# EAGLE board panel-gps (EAGLE 7.5.0)
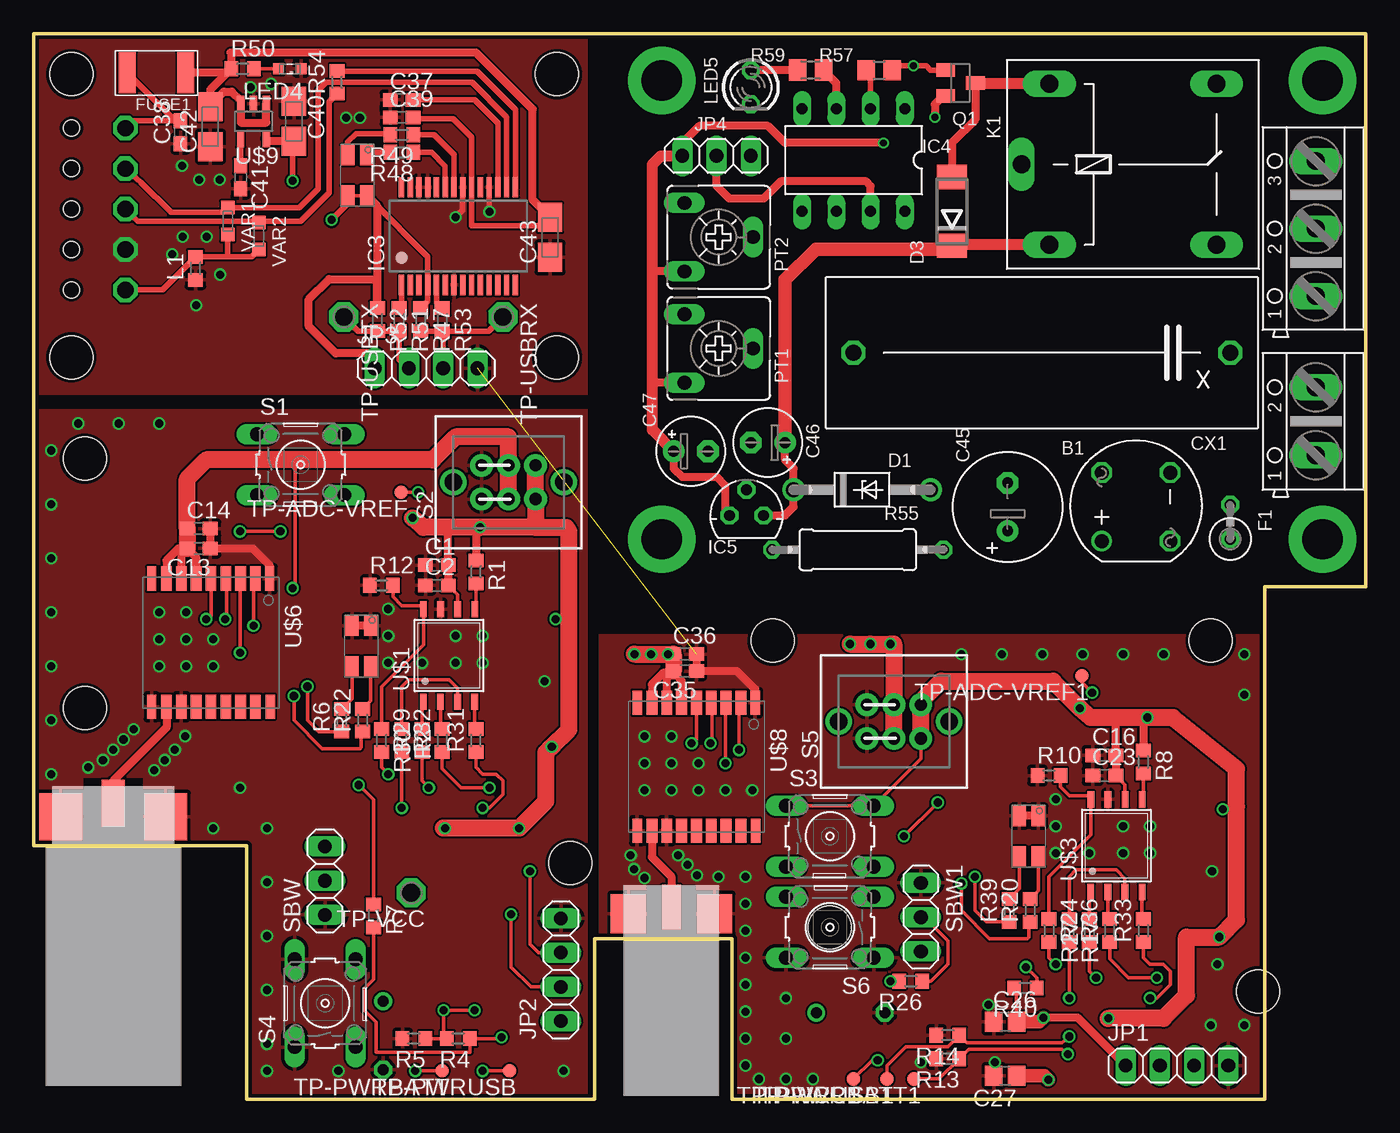
[diagram p0: board, top side]
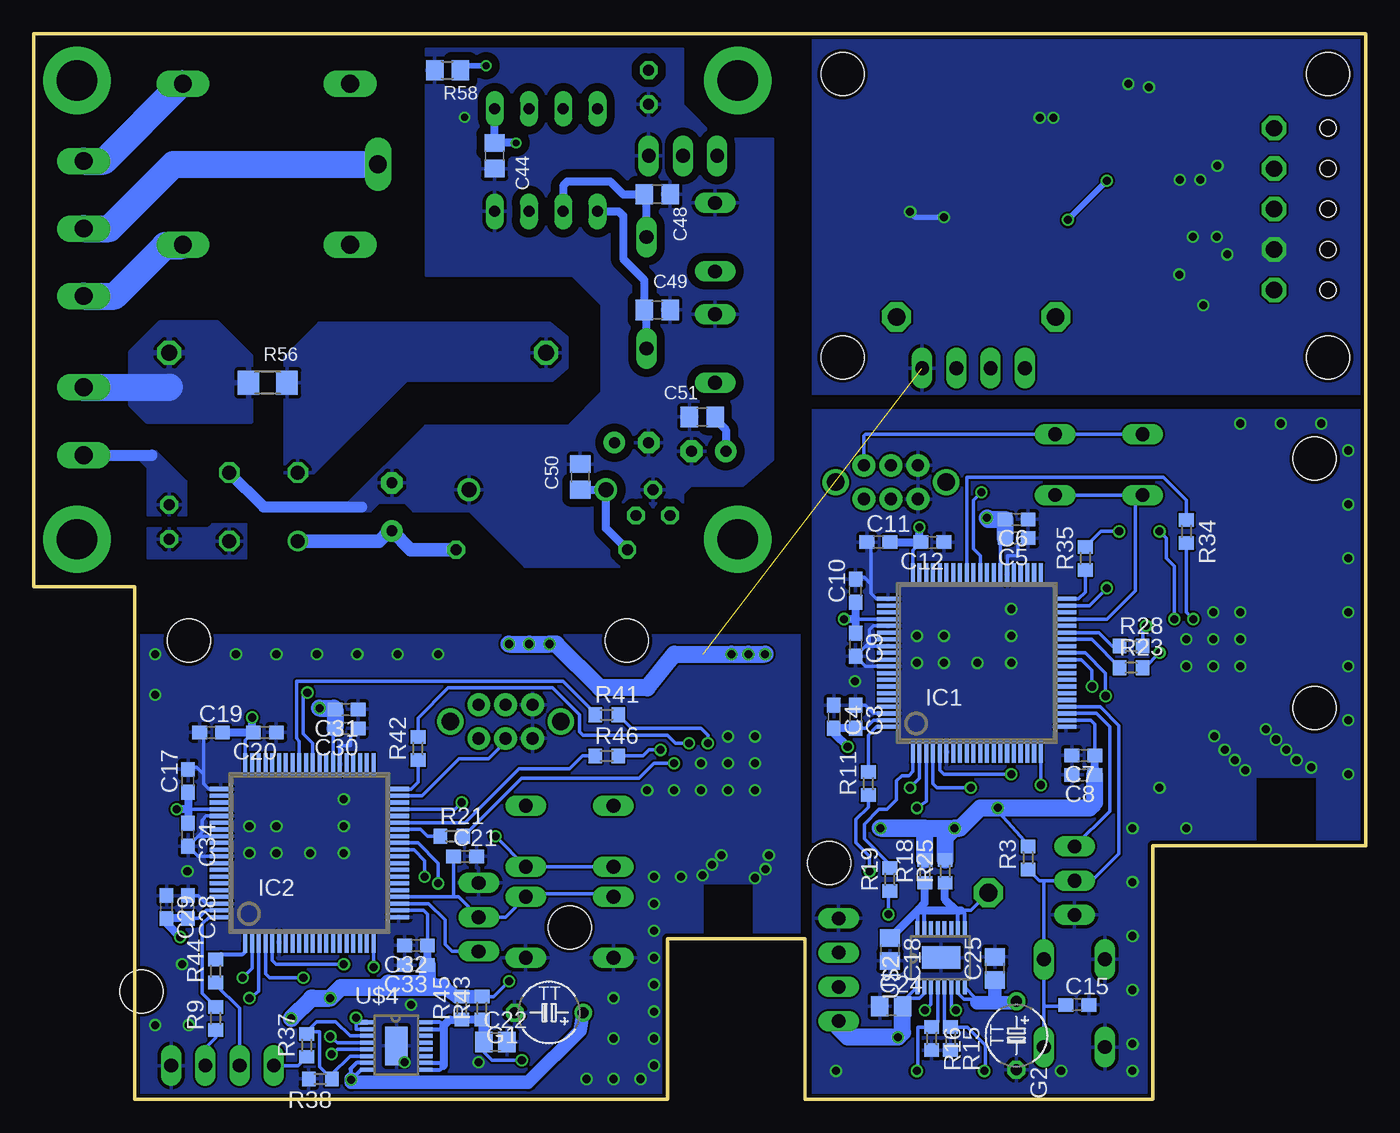
[diagram p1: board, bottom side, seen from below]

Size 98.8 x 79 mm. Coordinates in mm from the lower left corner, seen from the top.
Outline: 42.35,11.9 51.8,11.9 51.8,0 91.3,0 91.3,38 98.8,38 98.8,79 0,79 0,18.8 15.8,18.8 15.8,0 41.6,0 41.6,11.9 42.3,11.9
Copper layers (1*16): Top 0.035mm / dielectric 1.5mm / Bottom 0.035mm
Design rules "SeeedStudio_2layer_DRU_no_angle_20140221": minimum track width 6mil, minimum drill 12mil, track to track 6mil, track to pad 6mil, pad to pad 6mil, via to via 6mil, smd to smd 0mil, copper to edge 10mil, drill to drill 10mil, minimum pad ring 10mil, minimum via ring 6mil, stop-mask expansion 2mil, vias tented up to drill 100mil, thermal gap 10mil
Net classes: 0 signal: width 0.254 mm, drill 0.254 mm, clearance 0.152 mm; 1 charimp50: width 0.61 mm, drill 0.254 mm, clearance 0.559 mm
Holes 3.2 mm at 54.8,34 59.05,12.75 90.8,8 87.3,34 3.8,29 3.8,47.5 39.8,17.5 2.8,55 38.8,55 38.8,76 2.8,76
Holes 1.2 mm at 2.8,72 2.8,69 2.8,66 2.8,63 2.8,60
tRestrict: area 41.1,0.1 to 41.9,79; area 41.3,34.5 to 91.3,35.5; area -0.1,51.2 to 41.8,52.2
bRestrict: area 41.1,0.1 to 41.9,79; area -0.1,51.2 to 41.8,52.2; area 41.3,34.5 to 91.3,35.5

## Footprints (pad centres in the part's own frame; a part is rotated, then mirrored left to right if it is on the bottom)
RB1A = drill 1.016: + -2.54,2.54 | drill 1.016 octagon: - 2.54,-2.54; AC1 2.54,2.54; AC2 -2.54,-2.54
C0603 = smd 1.1 x 1: 1 -0.85,0; 2 0.85,0
C0805 = smd 1.3 x 1.5: 1 -0.85,0; 2 0.85,0
A/3216-18W = smd 2.15 x 1.8: + 1.475,0; - -1.475,0
C0805' = smd 1.3 x 1.5: 1 -0.95,0; 2 0.95,0
E3,5-8 = drill 0.813 pad 1.6: + -1.778,0 | drill 0.813 pad 1.6 octagon: - 1.778,0
E2,5-5 = drill 0.813 pad 1.6: + -1.27,0 | drill 0.813 pad 1.6 octagon: - 1.27,0
XC27B11 = drill 1.194 octagon: 1 -13.97,0; 2 13.97,0
DO41Z10 = drill 1.118: A 5.08,0; C -5.08,0
DO214AA = smd 1.8 x 2.2: A 2.55,0; C -2.55,0
0309V = drill 0.813 octagon: 1 -1.27,0; 2 1.27,0
F1812 = smd 1.27 x 3.048: 1 -2.159,0; 2 2.159,0
TAP5-45 = drill 0.813: + -2.54,0 | drill 0.813 octagon: - 2.54,0
PN_S-PQFP-G80 = smd 0.3 x 1.6: 1 -4.75,-6.6; 2 -4.25,-6.6; 3 -3.75,-6.6; 4 -3.25,-6.6; 5 -2.75,-6.6; 6 -2.25,-6.6; 7 -1.75,-6.6; 8 -1.25,-6.6; 9 -0.75,-6.6; 10 -0.25,-6.6; 11 0.25,-6.6; 12 0.75,-6.6; 13 1.25,-6.6; 14 1.75,-6.6; 15 2.25,-6.6; 16 2.75,-6.6; 17 3.25,-6.6; 18 3.75,-6.6; 19 4.25,-6.6; 20 4.75,-6.6; 41 4.75,6.6; 42 4.25,6.6; 43 3.75,6.6; 44 3.25,6.6; 45 2.75,6.6; 46 2.25,6.6; 47 1.75,6.6; 48 1.25,6.6; 49 0.75,6.6; 50 0.25,6.6; 51 -0.25,6.6; 52 -0.75,6.6; 53 -1.25,6.6; 54 -1.75,6.6; 55 -2.25,6.6; 56 -2.75,6.6; 57 -3.25,6.6; 58 -3.75,6.6; 59 -4.25,6.6; 60 -4.75,6.6 | smd 1.6 x 0.3: 21 6.6,-4.75; 22 6.6,-4.25; 23 6.6,-3.75; 24 6.6,-3.25; 25 6.6,-2.75; 26 6.6,-2.25; 27 6.6,-1.75; 28 6.6,-1.25; 29 6.6,-0.75; 30 6.6,-0.25; 31 6.6,0.25; 32 6.6,0.75; 33 6.6,1.25; 34 6.6,1.75; 35 6.6,2.25; 36 6.6,2.75; 37 6.6,3.25; 38 6.6,3.75; 39 6.6,4.25; 40 6.6,4.75; 61 -6.6,4.75; 62 -6.6,4.25; 63 -6.6,3.75; 64 -6.6,3.25; 65 -6.6,2.75; 66 -6.6,2.25; 67 -6.6,1.75; 68 -6.6,1.25; 69 -6.6,0.75; 70 -6.6,0.25; 71 -6.6,-0.25; 72 -6.6,-0.75; 73 -6.6,-1.25; 74 -6.6,-1.75; 75 -6.6,-2.25; 76 -6.6,-2.75; 77 -6.6,-3.25; 78 -6.6,-3.75; 79 -6.6,-4.25; 80 -6.6,-4.75
SSOP28 = smd 0.4 x 1.5: 1 -4.225,-3.625; 2 -3.575,-3.625; 3 -2.925,-3.625; 4 -2.275,-3.625; 5 -1.625,-3.625; 6 -0.975,-3.625; 7 -0.325,-3.625; 8 0.325,-3.625; 9 0.975,-3.625; 10 1.625,-3.625; 11 2.275,-3.625; 12 2.925,-3.625; 13 3.575,-3.625; 14 4.225,-3.625; 15 4.225,3.625; 16 3.575,3.625; 17 2.925,3.625; 18 2.275,3.625; 19 1.625,3.625; 20 0.975,3.625; 21 0.325,3.625; 22 -0.325,3.625; 23 -0.975,3.625; 24 -1.625,3.625; 25 -2.275,3.625; 26 -2.925,3.625; 27 -3.575,3.625; 28 -4.225,3.625
DIL8 = drill 0.813 long: 1 -3.81,-3.81; 2 -1.27,-3.81; 3 1.27,-3.81; 4 3.81,-3.81; 5 3.81,3.81; 6 1.27,3.81; 7 -1.27,3.81; 8 -3.81,3.81
78LXX = drill 0.813 octagon: GND 0,1.905; IN 1.27,0; OUT -1.27,0
1X04 = drill 1.016 long: 1 -3.81,0; 2 -1.27,0; 3 1.27,0; 4 3.81,0
1X03 = drill 1.016 long: 1 -2.54,0; 2 0,0; 3 2.54,0
RAS-12XX = drill 1.321 long: 1 -7.693,-5.969; 2 -7.693,5.969; O 4.699,5.969; P -9.76,0; S 4.699,-5.969
R0603 = smd 1 x 1.1: 1 -0.85,0; 2 0.85,0
BILED = smd 1.5 x 1: 1 -1.5,0.7; 2 1.5,0.7; 3 -1.5,-0.7; 4 1.5,-0.7
LED_KINGBRIGHT0603 = smd 0.8 x 0.8: A 0.825,0; C -0.825,0
LED3MM = drill 0.813 octagon: A -1.27,0; K 1.27,0
CA6V = drill 1.016 long: A -2.54,-2.54; E 2.54,-2.54; S 0,2.54
SOT23 = smd 1 x 1.4: 1 -0.95,-1.1; 2 0.95,-1.1; 3 0,1.1
0309/12 = drill 0.813 octagon: 1 -6.35,0; 2 6.35,0
R1206 = smd 1.6 x 1.803: 1 -1.422,0; 2 1.422,0
R0805 = smd 1.3 x 1.5: 1 -0.95,0; 2 0.95,0
M0805 = smd 1.3 x 1.6: 1 -0.95,0; 2 0.95,0
B3F-10XX = drill 1.016 long: 1 -3.251,2.261; 2 3.251,2.261; 3 -3.251,-2.261; 4 3.251,-2.261
2P2T = drill 0.9 pad 1.676: 1.1 -2,1.25; 1.2 -2,-1.25; 2.1 0,1.25; 2.2 0,-1.25; 3.1 2,1.25; 3.2 2,-1.25 | drill 1.3 pad 1.93: 3.3 4.1,0; 3.4 -4.1,0
TP10R = smd 1 x 1: TP 0,0
P1-13 = drill 1.321 pad 2.159 octagon: TP 0,0
JSOP-08 = smd 0.5 x 1.2: 1 -1.905,-3.429; 2 -0.635,-3.429; 3 0.635,-3.429; 4 1.905,-3.429; 5 1.913,3.429; 6 0.643,3.429; 7 -0.627,3.429; 8 -1.897,3.429
MSOP16 = smd 1 x 0.3: 1 -2.2,1.75; 2 -2.2,1.25; 3 -2.2,0.75; 4 -2.2,0.25; 5 -2.2,-0.25; 6 -2.2,-0.75; 7 -2.2,-1.25; 8 -2.2,-1.75; 9 2.2,-1.75; 10 2.2,-1.25; 11 2.2,-0.75; 12 2.2,-0.25; 13 2.2,0.25; 14 2.2,0.75; 15 2.2,1.25; 16 2.2,1.75 | smd 1.65 x 2.85: EXP 0,0
MWSL1251 = smd 3.2 x 3.5: P$1 -3.9,-2.25; P$3 3.9,-2.25 | smd 1.7 x 3.5: P$2 0,-3.25
MAX-8 = smd 1.8 x 0.7: 1 9.6,0.7; 9 9.6,9.45; 10 0.1,9.45; 18 0.1,0.65 | smd 1.8 x 0.8: 2 9.6,1.75; 3 9.6,2.85; 4 9.6,3.95; 5 9.6,5.05; 6 9.6,6.15; 7 9.6,7.25; 8 9.6,8.35; 11 0.1,8.35; 12 0.1,7.25; 13 0.1,6.15; 14 0.1,5.05; 15 0.1,3.95; 16 0.1,2.85; 17 0.1,1.75
MWSL1350 = smd 2.6 x 2.9: P$1 -3.2,-1.45; P$3 3.2,-1.45 | smd 1.4 x 3.3: P$2 0,-1.95
SOT23-5 = smd 0.55 x 1.2: 1 -0.95,-1.3; 2 0,-1.3; 3 0.95,-1.3; 4 0.95,1.3; 5 -0.95,1.3
CT/CN0603 = smd 1 x 1: 1 -1,0; 2 1,0
AK500/2 = drill 1.321 long: 1 -2.515,0; 2 2.515,0
AK500/3 = drill 1.321 long: 1 -5.004,0; 2 0,0; 3 5.004,0

## Placement (x,y rotation side)
B1  [RB1A]  81.76,43.91 90 top
C1  1u  [C0603]  29.9,39.6 0 top
C2  100n  [C0603]  29.9,38.1 0 top
C3  100n  [C0603]  37.85,28.35 270 bottom
C4  1u  [C0603]  39.45,28.35 270 bottom
C5  100n  [C0603]  25.9,41.6 180 bottom
C6  1u  [C0603]  25.9,43 180 bottom
C7  100n  [C0603]  20.95,25.5 180 bottom
C8  1u  [C0603]  20.95,24.05 180 bottom
C9  100n  [C0603]  37.85,33.7 270 bottom
C10  1u  [C0603]  37.85,37.7 90 bottom
C11  100n  [C0603]  36.15,41.3 0 bottom
C12  1u  [C0603]  32.15,41.3 180 bottom
C13  100n  [C0603]  12.25,40.85 180 top
C14  1u  [C0603]  12.25,42.3 0 top
C15  1 n  [C0603]  21.4,7 0 bottom
C16  1u  [C0603]  79.4,25.5 0 top
C17  1u  [C0603]  87.35,23.6 90 bottom
C18  4.7uF at least  [C0805]  35.3,11.1 270 bottom
C19  100n  [C0603]  85.65,27.2 0 bottom
C20  1u  [C0603]  81.65,27.2 180 bottom
C21  1 n  [C0603]  66.8,18 0 bottom
C22  4.7uF at least  [C0805]  64.55,4.25 0 bottom
C23  100n  [C0603]  79.4,24 0 top
C24  4.7uF  [C0805]  35.2,6.9 0 bottom
C25  4.7uF at least  [C0805]  27.5,9.7 90 bottom
C26  4.7uF  [C0805]  72.05,5.75 0 top
C27  4.7uF at least  [C0805]  72.05,1.75 180 top
C28  100n  [C0603]  87.35,14.25 270 bottom
C29  1u  [C0603]  88.95,14.25 270 bottom
C30  100n  [C0603]  75.6,27.5 180 bottom
C31  1u  [C0603]  75.6,28.9 180 bottom
C32  100n  [C0603]  70.45,11.4 180 bottom
C33  1u  [C0603]  70.45,9.95 180 bottom
C34  100n  [C0603]  87.35,19.6 270 bottom
C35  100n  [C0603]  48.3,31.75 180 top
C36  1u  [C0603]  48.3,33 0 top
C37  100nF  [C0603]  27.3,74.1 0 top
C38  10nF  [C0603]  10.9,71.7 90 top
C39  100nF  [C0603]  27.3,72.8 0 top
C40  1uF  [A/3216-18W]  19.3,72.5 270 top
C41  470pF  [C0603]  15.35,68.35 270 top
C42  1uF  [A/3216-18W]  13.1,72.1 90 top
C43  4.7uF  [A/3216-18W]  38.3,63.9 90 top
C44  100nF  [C0805']  64.61,69.95 270 bottom
C45  100uF  [E3,5-8]  72.23,43.91 90 top
C46  [E2,5-5]  54.45,48.68 180 top
C47  [E2,5-5]  48.74,48.04 0 top
C48  [C0805']  52.55,67.09 0 bottom
C49  [C0805']  52.55,58.52 0 bottom
C50  100nF  [C0805']  58.27,46.14 90 bottom
C51  100nF  [C0805']  49.22,50.58 180 bottom
CX1  [XC27B11]  74.77,55.34 180 top
D1  BZX85  [DO41Z10]  61.44,45.19 0 top
D3  [DO214AA]  68.11,65.82 90 top
F1  3R3  [0309V]  88.74,42.8 90 top
FUSE1  SMD1206R500SF  [F1812]  9.1,76.1 180 top
G1  BATTERYTAP5-45  [TAP5-45]  60.58,6.42 180 bottom
G2  BATTERYTAP5-45  [TAP5-45]  25.92,4.72 270 bottom
IC1  MSP430FR698X(1)80-PIN_PN  [PN_S-PQFP-G80]  28.85,32.35 0 bottom
IC2  MSP430FR698X(1)80-PIN_PN  [PN_S-PQFP-G80]  78.35,18.25 0 bottom
IC3  FT232RL  [SSOP28]  31.5,64 0 top
IC4  PIC12F675P  [DIL8]  60.8,69.63 180 top
IC5  [78LXX]  52.87,43.28 0 top
JP1  [1X04]  84.8,2.5 0 top
JP2  [1X04]  39.1,9.6 90 top
JP3  [1X04]  29.1,54.2 0 top
JP4  [1X03]  50.64,69.95 180 top
K1  RAS-1215  [RAS-12XX]  83.03,69.31 0 top
L1  [R0603]  12,61.6 90 top
LED1  [BILED]  24.3,33.6 270 top
LED2  [BILED]  73.8,19.5 270 top
LED3  [BILED]  24,68.5 270 top
LED4  [LED_KINGBRIGHT0603]  19,76.4 180 top
LED5  [LED3MM]  53.18,75.03 270 top
PT1  [CA6V]  50.8,55.66 270 top
PT2  [CA6V]  50.8,63.92 270 top
Q1  BC846  [SOT23]  68.74,75.35 270 top
R1  470k  [R0603]  32.8,39.1 270 top
R2  470k  [R0603]  27.3,26.6 270 top
R3  47k  [R0603]  25.05,17.9 90 bottom
R4  100k  [R0603]  31.5,4.5 180 top
R5  39.2k  [R0603]  28.2,4.5 180 top
R6  160  [R0603]  22.85,28.1 90 top
R7  100  [R0603]  25.2,13.6 270 top
R8  470k  [R0603]  82.3,25 270 top
R9  100  [R0603]  85.3,6 90 bottom
R10  470k  [R0603]  75.3,24 0 top
R11  100  [R0603]  36.9,23.4 90 bottom
R12  470k  [R0603]  25.8,38.1 0 top
R13  1k  [R0603]  67.8,3 180 top
R14  1k  [R0603]  67.8,4.75 180 top
R15  1k  [R0603]  30.8,4.5 270 bottom
R16  1k  [R0603]  32.2,4.5 270 bottom
R17  470k  [R0603]  76.8,12.5 270 top
R18  0  [R0603]  32.7,16.9 90 bottom
R19  100  [R0603]  35.3,16.3 90 bottom
R20  180  [R0603]  73.9,14 90 top
R21  100  [R0603]  67.8,19.5 0 bottom
R22  180  [R0603]  24.4,28.1 90 top
R23  100  [R0603]  17.4,32 0 bottom
R24  100  [R0603]  78.3,12.5 90 top
R25  0  [R0603]  31.2,16.9 90 bottom
R26  47k  [R0603]  65.05,8.75 180 top
R27  100  [R0603]  75.3,12.5 270 top
R28  100  [R0603]  17.4,33.6 0 bottom
R29  100  [R0603]  28.8,26.6 90 top
R30  100  [R0603]  25.8,26.6 270 top
R31  100  [R0603]  32.8,26.6 90 top
R32  100  [R0603]  30.3,26.6 90 top
R33  100  [R0603]  82.3,12.5 90 top
R34  0  [R0603]  13.3,42.1 270 bottom
R35  0  [R0603]  20.8,40.1 90 bottom
R36  100  [R0603]  79.8,12.5 90 top
R37  100k  [R0603]  78.55,4 90 bottom
R38  39.2k  [R0603]  77.55,1.5 180 bottom
R39  160  [R0603]  72.35,14 90 top
R40  100  [R0603]  73.55,8.25 180 top
R41  0  [R0603]  56.3,28.5 0 bottom
R42  0  [R0603]  70.3,26 90 bottom
R43  0  [R0603]  65.55,6.75 90 bottom
R44  100  [R0603]  85.3,9.5 90 bottom
R45  0  [R0603]  67.05,6.75 90 bottom
R46  100  [R0603]  56.3,25.45 0 bottom
R47  33k  [R0603]  28.7,57.8 270 top
R48  240  [R0603]  27.3,70.2 180 top
R49  220  [R0603]  27.3,71.5 180 top
R50  150  [R0603]  15.5,76.4 0 top
R51  100  [R0603]  27.1,57.8 270 top
R52  33k  [R0603]  25.5,57.8 270 top
R53  100  [R0603]  30.3,57.8 270 top
R54  0  [R0603]  22.5,75.4 90 top
R55  220R  [0309/12]  61.12,40.74 180 top
R56  1M  [R1206]  81.44,53.12 0 bottom
R57  2.7k  [R0805]  62.71,76.3 0 top
R58  68k  [R0805]  68.11,76.3 0 bottom
R59  150R  [M0805]  57.63,76.3 0 top
S1  [B3F-10XX]  19.8,47.05 0 top
S2  2P2T  [2P2T]  35.22,45.75 0 top
S3  [B3F-10XX]  59.05,19.5 0 top
S4  RESET  [B3F-10XX]  21.61,7.12 90 top
S5  2P2T  [2P2T]  63.8,28 0 top
S6  RESET  [B3F-10XX]  59.05,12.75 180 top
SBW  [1X03]  21.6,16.2 90 top
SBW1  [1X03]  65.8,13.5 270 top
TP-ADC-VREF  TPSQTP10R  [TP10R]  27.25,45 180 top
TP-ADC-VREF1  TPSQTP10R  [TP10R]  77.75,31.4 180 top
TP-PWRBATT  TPSQTP10R  [TP10R]  30.3,2.1 180 top
TP-PWRBATT1  TPSQTP10R  [TP10R]  65.3,1.5 180 top
TP-PWRUSB  TPSQTP10R  [TP10R]  35.3,2.1 180 top
TP-PWRUSB1  TPSQTP10R  [TP10R]  63.3,1.5 180 top
TP-USBRX  TPSQPAD1-13  [P1-13]  34.8,58 270 top
TP-USBTX  TPSQPAD1-13  [P1-13]  23,58 270 top
TP-VCC  TPSQPAD1-13  [P1-13]  28,15.3 180 top
TP-VCC1  TPSQTP10R  [TP10R]  60.8,1.5 180 top
U$1  AT45DB641E-SHNJSOP-08  [JSOP-08]  30.8,32.9 0 top
U$2  LTC4415  [MSOP16]  31.5,10.5 90 bottom
U$3  AT45DB641E-SHNJSOP-08  [JSOP-08]  80.3,18.8 0 top
U$4  LTC4415  [MSOP16]  71.9,3.95 0 bottom
U$5  MWSL1251  [MWSL1251]  5.9,18.7 180 top
U$6  MAX-8C-0  [MAX-8]  18.2,29 90 top
U$7  MWSL1251MWSL1350  [MWSL1350]  47.3,12.3 180 top
U$8  MAX-8C-0  [MAX-8]  54.2,19.8 90 top
U$9  TC1185  [SOT23-5]  16.3,72.5 180 top
VAR1  VARISTORCN0603  [CT/CN0603]  14.4,65.1 270 top
VAR2  VARISTORCN0603  [CT/CN0603]  16.7,64 270 top
X2  [AK500/2]  95.09,50.27 90 top
X3  [AK500/3]  95.09,64.55 90 top

## Library data of the parts
B1 = rectifier
C1-C39 C41 = tagps; SPICEPREFIX: C
C40 C42 C43 G1 G2 IC1 IC2 JP1-JP3 LED1-LED4 S2 S5 SBW SBW1 TP-ADC-VREF TP-ADC-VREF1 TP-PWRBATT TP-PWRBATT1 TP-PWRUSB TP-PWRUSB1 TP-USBRX TP-USBTX TP-VCC TP-VCC1 U$1-U$9 VAR1 VAR2 = tagps
C44-C51 CX1 F1 R55-R59 = rcl
D1 D3 = diode
FUSE1 = tagps; MPN: SMD1206R500SF
IC3 = tagps; MPN: FT232RL; OC_FARNELL: 1146032; OC_NEWARK: 91K9918
IC4 = microchip; MF: MICROCHIP; MPN: PIC12F675-E/P; OC_FARNELL: 9759018; OC_NEWARK: 92C4340
IC5 = v-reg
JP4 = pinhead
K1 = my_library
L1 R1-R54 = tagps; SPICEPREFIX: R
LED5 = led
PT1 PT2 = pot
Q1 = transistor
S1 S3 S4 S6 = tagps; MPN: B3F-1000; OC_FARNELL: 176432; OC_NEWARK: 36M3542
X2 X3 = con-ptr500; OC_FARNELL: unknown; OC_NEWARK: unknown

## Nets
+5V: C44.1 C47.+ C51.1 IC4.1 IC5.OUT JP4.3 PT1.E PT2.E
+12V: C46.+ C50.1 D1.C D3.C IC5.IN K1.1 R55.2
ADC-BATT: R15.1 TP-PWRBATT.TP U$2.5
ADC-BATT2: R13.1 TP-PWRBATT1.TP U$4.5
ADC-VREF: IC1.50 TP-ADC-VREF.TP
ADC-VREF2: IC2.50 TP-ADC-VREF1.TP
FT232-RX: JP3.3 R47.2 R53.2 TP-USBRX.TP
FT232-TX: JP3.2 R51.2 R52.2 TP-USBTX.TP
GND: C1.1 C2.1 C3.1 C4.1 C5.1 C6.1 C7.2 C8.2 C9.2 C10.2 C11.1 C12.1 C13.1 C14.2 C15.2 C18.2 C24.1 C25.2 G2.- IC1.6 IC1.21 IC1.46 IC1.61 IC1.65 IC1.68 IC1.71 IC1.78 JP2.4 LED1.1 LED1.3 R5.2 R12.1 R15.2 R16.2 S2.1.1 S2.1.2 S4.1 S4.2 SBW.1 U$1.7 U$2.EXP U$5.P$1 U$5.P$3 U$6.1 U$6.10 U$6.12
GND1: C16.1 C17.2 C19.1 C20.1 C21.2 C22.2 C23.1 C26.1 C27.2 C28.1 C29.1 C30.1 C31.1 C32.2 C33.2 C34.2 C35.1 C36.2 C37.1 C38.1 C39.1 C40.- C41.2 C42.- C43.- G1.- IC2.6 IC2.21 IC2.46 IC2.61 IC2.65 IC2.68 IC2.71 IC2.78 IC3.7 IC3.18 IC3.21 IC3.25 IC3.26 JP1.4 JP3.4 L1.1 LED2.1 LED2.3 LED4.C R10.1 R13.2 R14.2 R38.2 S5.1.1 S5.1.2 S6.1 S6.2 SBW1.1 U$3.7 U$4.EXP U$7.P$1 U$7.P$3 U$8.1 U$8.10 U$8.12 U$9.2
GND2: B1.- C44.2 C45.- C46.- C47.- C48.2 C49.2 C50.2 C51.2 D1.A IC4.8 IC5.GND JP4.1 LED5.K PT1.A PT2.A Q1.2 R58.1
LED: IC4.3 R59.2
LED1: IC1.32 R22.1
LED2: IC1.31 R6.1
LED5: IC2.31 R39.1
LED6: IC2.32 R20.1
MB-GPS-RX: R23.2 U$6.3
MB-GPS-RX2: R21.2 U$8.3
MB-GPS-TIMEPULSE: IC1.40 R35.1
MB-GPS-TIMEPULSE2: IC2.40 R42.1
MB-GPS-TX: R28.2 U$6.2
MB-GPS-TX2: R46.2 U$8.2
MB-GPS-WAKEUP: IC1.52 R34.1
MB-GPS-WAKEUP2: IC2.52 R41.1
MB-PWR_GPS_SENSE: C13.2 C14.1 IC1.39 S2.2.1 S2.2.2 U$6.6 U$6.7 U$6.8
MB-PWR_GPS_SENSE2: C35.2 C36.1 IC2.39 S5.2.1 S5.2.2 U$8.6 U$8.7 U$8.8
MCU-RX-FT2: IC2.1 R44.2
MCU-RX-FT232: IC1.1 R19.2
MCU-TX-FT2: JP1.3 R9.1
MCU-TX-FT232: JP2.3 R11.1
N$1: IC2.80 R9.2
N$2: IC1.80 R11.2
N$3: IC1.4 R29.1
N$5: R2.1 U$1.3
N$7: R4.2 R5.1 U$2.3 U$2.6
N$8: JP2.2 R19.1
N$11: R1.2 U$1.5
N$14: R12.2 R30.1 U$1.8
N$24: IC1.2 R32.1
N$25: R16.1 TP-PWRUSB.TP U$2.4
N$26: C18.1 R18.1 R25.1 TP-VCC.TP U$2.9 U$2.10 U$2.15 U$2.16
N$27 [charimp50]: U$5.P$2 U$6.11
N$30: R37.2 R38.1 U$4.3 U$4.6
N$31: R17.1 U$3.3
N$32: R8.2 U$3.5
N$33: LED1.4 R6.2
N$34: LED1.2 R22.2
N$35: IC1.3 R31.1
N$36: IC1.34 R23.1
N$37: R14.1 TP-PWRUSB1.TP U$4.4
N$38: C22.1 R43.1 R45.1 TP-VCC1.TP U$4.9 U$4.10 U$4.15 U$4.16
N$39: IC2.3 R33.1
N$40: IC2.4 R24.1
N$41: R10.2 R27.1 U$3.8
N$42: IC2.2 R36.1
N$43: LED2.4 R39.2
N$44: LED2.2 R20.2
N$45: IC1.35 R28.1
N$46: R34.2 U$6.5
N$47: R35.2 U$6.4
N$48: IC2.34 R21.1
N$49: R41.2 U$8.5
N$50: R42.2 U$8.4
N$51 [charimp50]: U$7.P$2 U$8.11
N$52: JP1.2 R44.1
N$53: IC2.35 R46.1
N$54: IC3.1 R51.1
N$55: C37.2 IC3.17
N$56: IC3.23 R48.1
N$57: IC3.22 R49.1
N$58: LED3.1 R48.2
N$59: R54.1 VAR2.1
N$60: IC3.16 VAR1.1
N$61: C41.1 U$9.4
N$62: C38.2 FUSE1.2
N$63: L1.2 VAR1.2 VAR2.2
N$64: LED3.3 R49.2
N$65: LED4.A R50.2
N$66: IC3.5 R53.1
N$67: IC3.15 R54.2
N$68: D3.A K1.2 Q1.3
N$69: B1.+ C45.+ R55.1
N$70: K1.P X3.2
N$71: K1.S X3.1
N$72: K1.O X3.3
N$73: B1.AC1 CX1.2 R56.2
N$74: B1.AC2 F1.1
N$75: CX1.1 R56.1 X2.2
N$76: Q1.1 R57.2 R58.2
N$77: LED5.A R59.1
N$81: F1.2 X2.1
PT1: C48.1 IC4.6 PT2.S
PT2: C49.1 IC4.5 PT1.S
PWR-USB-SENSE: IC1.20 R7.1
PWR-USB-SENSE2: IC2.20 R40.1
RL1: IC4.2 R57.1
SBW-TCK: IC1.23 SBW.3
SBW-TCK2: IC2.23 SBW1.3
SBW-TDO/TDI: C15.1 IC1.24 R3.1 S4.3 S4.4 SBW.2
SBW-TDO/TDI2: C21.1 IC2.24 R26.1 S6.3 S6.4 SBW1.2
SPICLK: R32.2 U$1.2
SPICLK2: R36.2 U$3.2
SPICSN: R31.2 U$1.4
SPICSN2: R33.2 U$3.4
SPISI: R29.2 U$1.1
SPISI2: R24.2 U$3.1
SPISO: IC1.5 R30.2
SPISO2: IC2.5 R27.2
SW-CFG-GPS: IC1.37 S1.3 S1.4
SW-CFG-GPS2: IC2.37 S3.3 S3.4
THERM: IC4.7 JP4.2
VBUS: C39.2 C42.+ C43.+ FUSE1.1 IC3.20 R50.1 U$9.1 U$9.3
VCC: C1.2 C2.2 C3.2 C4.2 C5.2 C6.2 C7.1 C8.1 C9.1 C10.1 C11.2 C12.2 IC1.22 IC1.47 IC1.60 IC1.64 IC1.79 R1.1 R2.2 R3.2 R18.2 R25.2 S1.1 S1.2 S2.3.1 S2.3.2 U$1.6
VCC1: C16.2 C17.1 C19.2 C20.2 C23.2 C28.2 C29.2 C30.2 C31.2 C32.1 C33.1 C34.1 IC2.22 IC2.47 IC2.60 IC2.64 IC2.79 R8.1 R17.2 R26.2 R43.2 R45.2 S3.1 S3.2 S5.3.1 S5.3.2 U$3.6
VCC_BATT_IN: C25.1 G2.+ U$2.7 U$2.8
VCC_BATT_IN2: C27.1 G1.+ U$4.7 U$4.8
VCCUSB: C40.+ IC3.4 JP3.1 LED3.2 LED3.4 R47.1 R52.1 U$9.5
VCCUSBGPS: C24.2 JP2.1 R4.1 R7.2 U$2.1 U$2.2
VCCUSBGPS2: C26.2 JP1.1 R37.1 R40.2 U$4.1 U$4.2

## Tracks (layer width: path | path; a pad name or v marks a point on that pad's centre or on a via)
+5V  (via drill 0.5)
  Top 0.6: PT1.E 45.88,53.12 | PT2.E 45.88,61.38 | v63.03,70.9 55.72,70.9 54.45,72.17 49.38,72.17 48.1,70.9 JP4.3 | C47.+ 47.47,46.77 48.1,46.14 50.64,46.14 51.28,45.5 51.28,43.6 IC5.OUT
  Top 0.8: C47.+ 45.88,49.63 45.88,53.12 45.88,61.38 45.88,69.31 46.52,69.95 JP4.3
  Bottom 0.6: C44.1 | C51.1 48.27,50.43 47.47,49.63 C47.+ | v63.03,70.9 C44.1 | C44.1 IC4.1
+12V
  Top 0.6: IC5.IN 55.72,43.28 56.36,43.91 D1.C 56.36,46.77 55.72,47.41 C46.+
  Top 0.8: K1.1 68.18,63.35 D3.C
  Top 1: D3.C 67.86,63.03 58.01,63.03 55.72,60.74 C46.+
  Bottom 0.6: C50.1 D1.C 56.36,42.33 R55.2
ADC-BATT  (via drill 0.6)
  Top 0.254: v28.3,2.1 TP-PWRBATT.TP
  Bottom 0.254: U$2.5 31.25,5.8 arc-90 R15.1 29.55,5.35 28.2,4 28.2,2.2 v28.3,2.1
ADC-BATT2  (via drill 0.6)
  Top 0.254: v76.7,3.35 76.25,3.7 69.35,3.7 R13.1 67.15,1.5 TP-PWRBATT1.TP
  Bottom 0.254: U$4.5 76.25,3.7 v76.7,3.35
ADC-VREF  (via drill 0.6)
  Top 0.254: TP-ADC-VREF.TP v28.5,45
  Bottom 0.254: 28.6,44.9 v28.5,45 29.1,44.4 29.1,40.8 28.6,40.3 IC1.50
ADC-VREF2  (via drill 0.6)
  Top 0.254: TP-ADC-VREF1.TP 77.75,30.9 v78.5,30.15
  Bottom 0.254: IC2.50 78.1,26.4 78.8,27.1 78.8,29.85 v78.5,30.15
FT232-RX
  Top 0.406: R47.2 R53.2 | R53.2 33.75,56.95 TP-USBRX.TP | R53.2 30.37,56.95 JP3.3
FT232-TX
  Top 0.406: TP-USBTX.TP 24.05,56.95 R52.2 R51.2 27.1,54.83 JP3.2
GND  (via drill 0.6)
  Top 0.61: LED1.1 LED1.3 | U$6.1 17.5,39.6 16.25,40.85 C13.1 C14.2
  Bottom 0.254: 22.1,27.6 IC1.21 | 25.1,41.25 C5.1 25.8,41.05 25.8,40.3 26.6,40.3 IC1.46 | IC1.61 36.3,37.1 36.7,37.5 36.7,38.2 | 36.7,38.2 37.2,38.7 37.7,38.7 C10.2 | IC1.78 36.5,28.6 37.1,29.2 C3.1 | 37,41.2 36.7,40.9 36.7,38.2 | IC1.71 37.1,32.1 C9.2 37.1,33.6 | IC1.68 37.1,33.6 | IC1.65 36.5,35.1 36.8,34.8 36.8,33.9 37.1,33.6
  other vias: 37.9,31 26.3,36.35 33.3,34.35 31.3,34.35 26.3,34.35 26.3,32.35 28.8,32.35 31.3,32.35 33.3,32.35 9.71,25.15 17.3,2.1 22.6,2.1 39.3,2.1 1.3,44.1 1.3,48.1 10.47,25.91 11.23,26.92 4.04,24.6 5.13,25.15 5.9,25.91 1.3,40.1 1.3,36.1 1.3,32.1 1.3,28.1 1.3,24.1 13.3,20.1 17.3,20.1 17.3,16.1 9.3,32.1 11.3,32.1 13.3,32.1 9.3,34.1 9.3,36.1 11.3,34.1 11.3,36.1 13.3,34.1 15.3,23.1 17.3,12.1 17.3,8.1 17.3,4.1 3.3,50.1 6.3,50.1 9.3,50.1 6.66,26.67 7.42,27.43 8.94,24.38
  pour Top: -2.55,53.45 42.89,54.2 43.24,-3.75 -2.2,-4
  pour Bottom: -3.2,55.5 42.99,55.75 42.99,-7.25 -3.7,-6.5
GND1  (via drill 0.6, 1.2)  (1 unrouted)
  Top 0.254: U$8.12 47.07,20.02
  Top 0.406: IC3.21 31.82,65.92 v31.3,65.4 | v33.8,65.8 33.77,66.08 IC3.18
  Top 0.61: LED2.1 LED2.3 | U$8.1 53.5,30.4 52.15,31.75 C35.1 C36.2
  Bottom 0.254: 71.6,13.5 IC2.21 | 74.6,27.15 C30.1 75.3,26.95 75.3,26.2 76.1,26.2 IC2.46 | IC2.61 85.8,23 86.2,23.4 86.2,24.1 | 86.2,24.1 86.7,24.6 87.2,24.6 C17.2 | IC2.78 86,14.5 86.6,15.1 C28.1 | 86.5,27.1 86.2,26.8 86.2,24.1 | IC2.71 86.6,18 C34.2 86.6,19.5 | IC2.68 86.6,19.5 | IC2.65 86,21 86.3,20.7 86.3,19.8 86.6,19.5
  Bottom 0.406: v31.3,65.4 33.4,65.4 v33.8,65.8
  other vias: 87.4,16.9 75.8,22.25 82.8,20.25 80.8,20.25 75.8,20.25 75.8,18.25 78.3,18.25 80.8,18.25 82.8,18.25 52.8,6.5 52.8,12.5 45.3,22.9 47.3,22.9 49.3,22.9 45.3,24.9 47.3,24.9 47.3,26.9 49.3,24.9 45.3,26.9 51.3,22.9 53.3,22.9 52.8,4.5 57.8,1.5 48.5,17.4 47.8,18.1 44.53,17.06 44.28,18.08 52.8,10.5 49.2,16.6 45.3,16.4 65.8,2.75 52.8,8.5 52.8,2.5 53.8,1.5 55.8,1.5 55.8,4.5 55.8,7.5 70.8,7 71.3,2.75 11.04,63.94 12.82,63.94 13.84,61.14 12.06,58.86 10.28,62.64 17.6,75.28 16.08,75.02 13.79,68.17 12.27,68.17 11,69.21 23.17,72.77 24.19,72.77 89.8,30 89.8,33 80.8,33 83.8,33 77.8,33 74.8,33 71.8,33 68.8,33 52.8,14.5 52.8,16.5 50.8,16.5 87.8,10 89.8,5.5 87.3,5.5 6.8,63
  pour Top: 108.9,-9.1 -27.5,-10.15 -28.8,90.05 107.85,88.5
  pour Bottom: 93.85,-2.75 -31.45,-3.85 -32.7,92.5 110.15,88.95 109.75,8.5 109.95,-2
GND2  (via drill 0.5)
  Top 0.6: Q1.2 67.47,74.4 66.84,73.76 v66.84,72.81
  Bottom 0.8: 74.46,43.91 81.76,43.91 B1.-
  pour Bottom (isolate 0.6): 75.73,43.6 75.73,43.99 69.77,49.95 59.18,49.95 56.68,52.45 56.68,58.88 58.86,61.06 69.69,61.06 69.69,77.89 50.64,77.89 50.64,73.76 48.1,71.22 43.98,71.22 43.98,47.41 46.2,45.5 50.01,45.5 50.64,44.87 50.64,40.1 51.28,39.47 62.39,39.47 66.52,43.6 70.65,43.6 71.28,44.23 73.19,44.23 73.82,43.6
LED
  Top 0.6: IC4.3 59.53,75.34 R59.2
LED1  (via drill 0.6)
  Top 0.254: R22.1 24.3,27.15 24.3,26.1 24.2,26 21.4,26 19.3,28.1 v19.3,29.9
  Bottom 0.254: IC1.32 20.8,33.1 19.3,31.6 v19.3,29.9
LED2  (via drill 0.6)
  Top 0.254: v20.3,30.6 20.3,28.1 21.15,27.25 R6.1
  Bottom 0.254: IC1.31 21.1,32.6 20.3,31.8 v20.3,30.6
LED5  (via drill 0.6)
  Top 0.254: v69.8,16.5 69.8,14 70.65,13.15 R39.1
  Bottom 0.254: IC2.31 70.6,18.5 69.8,17.7 v69.8,16.5
LED6  (via drill 0.6)
  Top 0.254: R20.1 73.8,13.05 73.8,12 73.7,11.9 70.9,11.9 68.8,14 v68.8,16
  Bottom 0.254: IC2.32 70.3,19 68.8,17.5 v68.8,16
MB-GPS-RX  (via drill 0.6)
  Top 0.254: U$6.3 15.3,38.55 v15.3,33.1
  Bottom 0.254: R23.2 16.4,32 v15.3,33.1
MB-GPS-RX2  (via drill 0.6)
  Top 0.254: U$8.3 51.3,29.35 v51.3,24.9
  Bottom 0.254: v51.3,24.9 52.8,24.9 53.9,23.8 62.6,23.8 66.9,19.5 R21.2
MB-GPS-TIMEPULSE
  Bottom 0.254: IC1.40 21.3,37.1 20.8,37.6 R35.1
MB-GPS-TIMEPULSE2
  Bottom 0.254: IC2.40 70.8,23 70.3,23.5 R42.1
MB-GPS-TX  (via drill 0.6)
  Top 0.254: U$6.2 16.3,38.45 v16.3,35.1
  Bottom 0.254: v16.3,35.1 16.55,34.85 R28.2
MB-GPS-TX2  (via drill 0.6)
  Top 0.254: U$8.2 52.3,29.25 v52.3,25.9
  Bottom 0.254: v52.3,25.9 53.15,25.9 53.6,25.45 R46.2
MB-GPS-WAKEUP
  Bottom 0.254: IC1.52 29.6,46.1 15,46.1 13.3,44.4 R34.1
MB-GPS-WAKEUP2
  Bottom 0.254: IC2.52 79.1,26.55 79.3,26.75 79.3,31 59.55,31 57.15,28.6 R41.1
MB-PWR_GPS_SENSE  (via drill 0.6)
  Top 0.254: v19.2,37.9 19.4,38.1 19.4,47.4 | 10.75,40.85 C13.2
  Top 0.61: U$6.7 10.95,40.4 C13.2 12.05,40.2 U$6.6 | 10.75,40.85 9.85,39.95 U$6.8
  Top 1.27: C13.2 C14.1 11.4,46 12.8,47.4 19.4,47.4 29.6,47.4 31.3,49.1 35.22,49.1 S2.2.1 S2.2.2
  Bottom 0.254: IC1.39 20.5,36.6 v19.2,37.9
MB-PWR_GPS_SENSE2  (via drill 0.6)
  Top 0.254: 46.75,31.65 C35.2
  Top 0.61: U$8.7 46.95,31.2 C35.2 48.05,31 U$8.6 | 46.75,31.65 45.85,30.75 U$8.8
  Top 1.27: S5.2.2 S5.2.1 63.8,33.75 v63.55,33.75 v62.05,33.75 v60.55,33.75 | v44.55,33 C36.1 C35.2
  Bottom 0.254: IC2.39 70,22.5 67.25,25.25 65.05,25.25 63.8,26.5 S5.2.2
  Bottom 1.27: v63.55,33.75 v62.05,33.75 v60.55,33.75 60.05,33.75 56.8,30.5 53.3,30.5 51.3,33 v47.05,33 v45.8,33 v44.55,33
MCU-RX-FT2
  Bottom 0.305: R44.2 84.9,10.75 83.3,10.75 83.1,10.95 IC2.1
MCU-RX-FT232
  Bottom 0.254: IC1.1 33.6,24.3 33.9,24 34.4,24 34.8,23.6 34.8,22.2 35.5,21.5 36.1,21.5 37.2,20.4 37.2,19.3 35.3,17.4 R19.2
MCU-TX-FT2
  Bottom 0.254: R9.1 85.3,4.54 86.07,3.77
  Bottom 0.305: 86.07,3.77 JP1.3
MCU-TX-FT232  (via drill 0.6)
  Top 0.254: v36.8,16.9 36.8,11.5 37.43,10.87 JP2.3
  Bottom 0.254: v36.8,16.9 36.8,18 37.8,19 37.8,20.75 36.9,21.65 R11.1
MH$4  (via drill 3 pad 5)
  other vias: 46.59,41.52
N$1
  Bottom 0.254: IC2.80 85.8,13.5 86.3,13 86.3,7.85 R9.2
N$2
  Bottom 0.254: IC1.80 36.3,27.6 36.9,27 R11.2
N$3  (via drill 0.6)
  Top 0.254: v29.3,23.1 28.8,23.6 R29.1
  Bottom 0.254: IC1.4 32.1,23.4 31.8,23.1 v29.3,23.1
N$5
  Top 0.254: U$1.3 31.44,30.46 30.8,31.1 27.8,31.1 27.3,30.6 R2.1
N$7  (via drill 0.6)
  Top 0.254: R5.1 R4.2 30.4,4.75 v30.4,6.6 v32.7,6.6
  Bottom 0.254: 30.7,6.6 30.75,6.6 U$2.6 30.75,6.65 30.7,6.6 | 30.7,6.6 v30.4,6.6 | v32.7,6.6 32.25,7.05 U$2.3
N$8  (via drill 0.6)
  Top 0.254: v35.4,13.7 35.4,9.8 36.87,8.33 JP2.2
  Bottom 0.254: R19.1 35.4,15.35 v35.4,13.7
N$11
  Top 0.254: U$1.5 32.8,36.42 R1.2
N$14
  Top 0.254: R30.1 25.8,30.6 28.9,33.7 U$1.8 | 28.8,36.43 U$1.8 | R12.2 26.65,37.25 27.3,36.6 28.63,36.6 U$1.8
N$24  (via drill 0.6)
  Top 0.254: R32.1 30.3,24.5 31.7,23.1 v33.8,23.1
  Bottom 0.254: IC1.2 33.1,23.8 v33.8,23.1
N$25  (via drill 0.6)
  Top 0.254: v33.3,2.1 TP-PWRUSB.TP
  Bottom 0.254: U$2.4 31.75,5.8 arc90 R16.1 33.2,5.35 33.2,2.2 v33.3,2.1
N$26
  Bottom 0.254: TP-VCC.TP 29.3,14 30.3,14
  Bottom 0.305: U$2.9 29.75,13.75 30,14 30.25,13.75 U$2.10 | 35.8,12.1 35.65,11.95 C18.1 arc-90 35,12.25 | U$2.15 32.75,13.75 33,14 33.25,13.75 U$2.16
  Bottom 0.61: 33.15,14.1 C18.1 | 33.15,14.1 33.05,14 33,14 30.4,14 | 30.4,14 30.3,14 30,14 | 33.15,14.1 32.7,14.55 R18.1 | 30.4,14 31.2,14.8 R25.1
N$27
  Top 0.61: U$6.11 9.85,27.58 5.9,23.63 U$5.P$2
N$30
  Bottom 0.254: U$4.3 75.35,4.7 76.4,5.75 77.8,5.75 78.55,5 | U$4.6 75.35,3.2 76.7,1.85 R38.1 77.6,2.4 77.6,5 78.55,5 | 78.55,5 R37.2
N$31
  Top 0.254: U$3.3 80.94,16.36 80.3,17 77.3,17 76.8,16.5 R17.1
N$32
  Top 0.254: U$3.5 82.3,22.32 R8.2
N$33
  Top 0.254: R6.2 23.6,29.7 LED1.4
N$34
  Top 0.254: R22.2 25,29.55 LED1.2
N$35  (via drill 0.6)
  Top 0.254: R31.1 32.8,24.6 33.3,24.1 34.3,24.1 34.8,23.6 34.8,22.6 33.8,21.6 v33.3,21.6
  Bottom 0.254: IC1.3 32.6,22.1 v33.3,21.6
N$36
  Bottom 0.254: IC1.34 20.3,34.1 R23.1
N$37  (via drill 0.6)
  Top 0.254: v76.8,4.65 76.25,4.2 69.2,4.2 R14.1 67.8,3.9 64.7,3.9 63.3,2.5 TP-PWRUSB1.TP
  Bottom 0.254: U$4.4 76.25,4.2 v76.8,4.65
N$38  (via drill 0.6)
  Top 0.254: v62.6,2.9 62.2,2.9 TP-VCC1.TP
  Bottom 0.254: v62.6,2.9 64.8,2.9 65.4,3.5 C22.1
  Bottom 0.305: U$4.9 68.65,2.2 68.4,2.45 68.65,2.7 U$4.10 | U$4.15 68.65,5.2 68.4,5.45 68.65,5.7 U$4.16
  Bottom 0.61: 68.4,2.45 68.4,5.45 67.95,5.9 R45.1 R43.1
  Bottom 0.813: C22.1 65.4,5.75 R43.1
N$39  (via drill 0.6)
  Top 0.254: R33.1 82.3,10.5 82.8,10 83.8,10 84.3,9.5 84.3,8.5 83.3,7.5 v82.8,7.5
  Bottom 0.254: IC2.3 82.1,8 v82.8,7.5
N$40  (via drill 0.6)
  Top 0.254: v78.8,9 78.3,9.5 R24.1
  Bottom 0.254: IC2.4 81.6,9.3 81.3,9 v78.8,9
N$41
  Top 0.254: R27.1 75.3,16.5 78.4,19.6 U$3.8 | 78.3,22.33 U$3.8 | R10.2 76.15,23.15 76.8,22.5 78.13,22.5 U$3.8
N$42  (via drill 0.6)
  Top 0.254: R36.1 79.8,10.4 81.2,9 v83.3,9
  Bottom 0.254: IC2.2 82.6,9.7 v83.3,9
N$43
  Top 0.254: R39.2 73.1,15.6 LED2.4
N$44
  Top 0.254: R20.2 74.5,15.45 LED2.2
N$45
  Bottom 0.254: IC1.35 19.8,34.6 18.8,33.6 R28.1
N$46  (via drill 0.6)
  Top 0.254: U$6.5 13.15,35.85 v12.8,35.6
  Bottom 0.254: v12.8,35.6 13.3,36.1 R34.2
N$47  (via drill 0.6)
  Top 0.254: U$6.4 14.3,38.55 14.3,35.7 v14.2,35.6 | v18.3,42.1 v15.3,42.1
  Bottom 0.254: v14.2,35.6 14.2,39.5 14.8,40.1 14.8,41.6 v15.3,42.1 | R35.2 19.65,42.1 v18.3,42.1
N$48
  Bottom 0.254: IC2.34 70.1,20 69.6,19.5 R21.1
N$49  (via drill 0.6)
  Top 0.254: U$8.5 49.15,26.65 v48.8,26.4
  Bottom 0.254: v48.8,26.4 48.8,27 49.3,27.5 54.45,27.5 R41.2
N$50  (via drill 0.6)
  Top 0.254: U$8.4 50.3,29.35 50.3,26.5 v50.2,26.4
  Bottom 0.254: R42.2 70.3,28.25 68.05,30.5 60.3,30.5 58.3,28.5 58.3,27.25 58.05,27 51.8,27 51.2,26.4 v50.2,26.4
N$51
  Top 0.61: U$8.11 45.85,17.95 47.3,16.5 U$7.P$2
  Top 0.813: 47.3,13.5 U$7.P$2
N$52
  Bottom 0.254: JP1.2 83.53,6.73 85.3,8.5 R44.1
N$53
  Bottom 0.254: IC2.35 66.8,20.5 62.8,24.5 59.05,24.5 58.1,25.45 R46.1
N$54
  Top 0.406: R51.1 arc90 27.28,58.83 IC3.1
N$55
  Top 0.406: IC3.17 34.42,72.38 32.7,74.1 C37.2
N$56
  Top 0.406: IC3.23 30.53,69.17 29.5,70.2 R48.1
N$57
  Top 0.406: R49.1 29.7,71.5 31.18,70.03 IC3.22
N$58
  Top 0.406: LED3.1 24.9,70.2 R48.2
N$59  (via drill 1.2)
  Top 0.406: R54.1 21.9,73.95 21.9,67.2 19.8,65.1 16.8,65.1 | 16.8,65.1 VAR2.1 | 16.8,65.1 7.7,65.1 v6.8,66
N$60  (via drill 1.2)
  Top 0.406: IC3.16 35.07,72.83 32.5,75.4 21.7,75.4 21.1,74.8 21.1,67.5 19.7,66.1 VAR1.1 14.05,65.75 10.18,65.75 7.93,68 v6.8,69
N$61
  Top 0.406: 15.4,71.2 U$9.4 C41.1
N$62  (via drill 1.2)
  Top 0.406: FUSE1.2 10.49,72.55 C38.2 7.35,72.55 v6.8,72
N$63  (via drill 1.2)
  Top 0.406: 14.4,62.45 L1.2 9.55,60 v6.8,60 | 14.4,62.45 VAR1.2 | VAR2.2 16.15,62.45 14.4,62.45
N$64
  Top 0.406: R49.2 26.35,71.6 23.9,71.6 23.3,71 LED3.3
N$65
  Top 0.254: R50.2 LED4.A
N$66
  Top 0.406: IC3.5 29.88,59.08 R53.1
N$67
  Top 0.406: R54.2 22.55,76.2 32.9,76.2 35.72,73.38 IC3.15
N$68
  Top 0.6: D3.A 68.11,70.9 69.84,72.64 Q1.3 69.91,75.28
  Top 0.8: K1.2 69.91,75.28
N$69
  Bottom 1: R55.1 70.84,40.74 C45.+ 72.43,42.14 73.19,41.38 B1.+
N$70
  Bottom 2: X3.2 93.19,64.55 88.43,69.31 K1.P
N$71
  Bottom 2: X3.1 92.8,59.55 89.06,63.28 87.79,63.28 K1.S
N$72
  Bottom 2: K1.O 87.86,75.28 93.58,69.56 X3.3
N$73
  pour Bottom: 80.17,45.82 78.58,45.82 71.12,53.28 60.33,53.28 59.22,54.23 59.22,56.48 60.49,57.57 77.67,57.57 80.17,55.07
N$74
  pour Bottom: 83.03,40.1 83.03,42.65 85.57,42.65 85.89,42.33 90.33,42.33 90.33,40.1
N$75
  Bottom 2: X2.2 88.77,52.78 88.74,52.8
  pour Bottom: 82.71,50.27 82.71,55.07 85.21,57.57 89.38,57.57 91.6,55.34 91.6,51.53 90.33,50.27
N$76  (via drill 0.5)
  Top 0.406: R57.2 63.98,76.62 v65.25,76.62 66.2,76.62 66.52,76.3 Q1.1
  Top 0.6: Q1.1
  Bottom 0.406: R58.2 67.16,76.62 v65.25,76.62
N$77
  Top 0.6: R59.1 LED5.A
N$78  (via drill 3 pad 5)
  other vias: 46.59,75.52
N$79  (via drill 3 pad 5)
  other vias: 95.59,75.52
N$80  (via drill 3 pad 5)
  other vias: 95.59,41.52
N$81
  Bottom 0.8: X2.1 90.04,47.75 90.02,47.73
  pour Bottom: 87.47,43.28 87.47,45.82 89.7,48.04 90.97,48.04 90.97,47.41 90.33,46.77 90.33,43.28
PT1
  Bottom 0.6: IC4.6 59.53,67.73 59.22,68.05 56.04,68.05 55.09,67.09 C48.1 53.34,66.94 PT2.S
PT2
  Bottom 0.6: IC4.5 55.41,65.82 55.09,65.5 55.09,62.33 53.5,60.74 C49.1 53.34,58.36 PT1.S
PWR-USB-SENSE  (via drill 0.6)
  Top 0.254: v24.1,23.3 25.2,22.2 R7.1
  Bottom 0.254: 24.1,26.35 IC1.20 v24.1,23.3
PWR-USB-SENSE2  (via drill 0.6)
  Top 0.254: v73.6,9.8 74.4,9 R40.1
  Bottom 0.254: 73.6,12.25 IC2.20 v73.6,9.8
RL1
  Top 0.406: IC4.2 62.07,76.3 R57.1
SBW-TCK
  Bottom 0.254: IC1.23 20,28.6 19,27.6 19,21.34 SBW.3
SBW-TCK2
  Bottom 0.254: IC2.23 69.5,14.5 68.3,13.3 68.3,11.5 67.76,10.96 SBW1.3
SBW-TDO/TDI
  Bottom 0.254: R3.1 24.2,16.2 23.87,16.2 | 23.87,16.2 SBW.2 20.3,16.2 18.3,18.2 18.3,27.7 19.7,29.1 IC1.24 | 23.87,6.9 S4.4 23.87,16.2 | 23.87,6.9 S4.3 | C15.1 22.35,6.9 23.87,6.9
SBW-TDO/TDI2
  Top 0.254: R26.1 66.55,8.75 67.8,10 67.8,11.75 66.05,13.5 SBW1.2
  Bottom 0.254: IC2.24 68.3,15 67.65,15 | 67.65,15 67.3,15 SBW1.2 63.81,13.5 S6.3 62.06,15.25 56.04,15.25 S6.4 | C21.1 67.65,15
SPICLK
  Top 0.254: U$1.2 30.16,27.45 R32.2
SPICLK2
  Top 0.254: U$3.2 79.66,13.35 R36.2
SPICSN
  Top 0.254: U$1.4 32.7,27.45 R31.2
SPICSN2
  Top 0.254: U$3.4 82.2,13.35 R33.2
SPISI
  Top 0.254: U$1.1 28.8,29.38 R29.2
SPISI2
  Top 0.254: U$3.1 78.3,15.28 R24.2
SPISO  (via drill 0.6)
  Top 0.254: v26.3,24.1 25.8,24.6 R30.2
  Bottom 0.254: IC1.5 31.6,24.4 31.3,24.1 v26.3,24.1
SPISO2  (via drill 0.6)
  Top 0.254: v75.8,10 75.3,10.5 R27.2
  Bottom 0.254: IC2.5 81.1,10.3 80.8,10 v75.8,10
SW-CFG-GPS
  Bottom 0.254: IC1.37 19.2,35.6 17.1,37.7 17.1,44.24 S1.3 S1.4
SW-CFG-GPS2  (via drill 0.6)
  Top 0.254: v64.55,19.5 v67.05,22
  Bottom 0.254: S3.3 S3.4 64.55,19.49 v64.55,19.5 | v67.05,22 67.55,21.5 IC2.37
THERM
  Top 0.6: IC4.7 62.07,67.73 61.76,68.05 55.41,68.05 54.14,66.78 51.6,66.78 50.64,67.73 JP4.2 50.64,69.31
VBUS
  Top 0.406: C43.+ 37.7,64.78 32.47,64.78 IC3.20 32.47,71.33 31.1,72.7 28.25,72.7 C39.2
  Top 0.61: U$9.1 17.25,72.4 15.35,72.4 U$9.3 15.35,74.05 14.7,74.7 14.1,74.7 13.1,73.7 C42.+ 13.1,74.85 14.35,76.1 | C43.+ 37,66.67 37,73.4 32.8,77.6 14.6,77.6 14.65,77.55 R50.1 14.35,76.1 | 14.35,76.1 FUSE1.1
VCC  (via drill 0.6)
  Top 0.254: 34.05,20.35 34.3,20.1 | 39.5,35.6 39.7,35.8 | C2.2 31.44,37.41 U$1.6 | R2.2 v27.3,21.6 | R1.1 33.1,40.25
  Top 0.61: C2.2 C1.2 30.75,42.35 30.8,42.4 | v38.7,35.6 39.5,35.6 | v33.1,42.4 32.8,42.1 R1.1
  Top 1.27: v38.42,26.12 38,25.7 38,22.1 v36,20.1 34.3,20.1 30.4,20.1 | 38.52,26.23 v38.42,26.12 | v38.42,26.12 39.7,27.4 39.7,35.8 39.7,42.1 39.5,42.4 37.22,42.4 | 37.22,42.4 v33.1,42.4 30.8,42.4 28.9,42.4 v28.1,43.1 | 37.22,42.4 S2.3.2 S2.3.1
  Bottom 0.254: IC1.47 27.1,41.6 C5.2 | C3.2 37.1,27.5 36.5,28.1 IC1.79 | IC1.64 37.85,35.6 | IC1.60 33.6,40.7 C12.2 | C7.1 20.1,27.8 20.4,28.1 IC1.22 | R3.2 25,18.8 27.5,21.6 | 16.5,49.3 S1.1 16.6,49.3 23,49.3 S1.2 23.1,49.3 37.1,49.3 37.22,49.18 S2.3.1 | v27.3,21.6 27.8,21.6
  Bottom 0.61: C8.1 C7.1 | C10.1 37.85,35.6 | 37.85,35.6 C9.1 | C3.2 C4.2 39.45,27.15 v38.42,26.12 | C11.2 C12.2 33.1,41.4 v33.1,42.4 | 37.85,35.6 v38.7,35.6
  Bottom 1.27: v30.5,20.1 30.1,20.1 28.6,21.6 27.8,21.6 27.5,21.6 v27.3,21.6 20.5,21.6 20.1,22 C8.1 | v30.5,20.1 v36,20.1 32.7,20.1 R18.2 | v30.5,20.1 31.2,19.4 R25.2 | C5.2 C6.2 28,43 v28.1,43.1
VCC1  (via drill 0.6)
  Top 0.254: 89,21.5 89.2,21.7 | C23.2 80.94,23.31 U$3.6 | R17.2 v76.8,7.5 | R8.1 82.6,26.15 | S5.3.2 65.8,25.26 S3.2 S3.1 | R26.2 v63.55,8.75
  Top 0.61: C23.2 C16.2 80.25,28.25 80.3,28.3 | v88.2,21.5 89,21.5 | v82.6,28.3 82.3,28 R8.1
  Top 1.27: 88.02,12.12 v87.92,12.03 | v87.92,12.03 89.2,13.3 89.2,21.7 89.2,24.5 84.5,28.3 v82.6,28.3 80.3,28.3 78.4,28.3 v77.6,29 75.6,31 67.3,31 65.8,29.5 S5.3.1 S5.3.2 | v79.7,6 83.8,6 85.5,7.7 85.5,12.03 v87.92,12.03
  Bottom 0.254: IC2.47 76.6,27.5 C30.2 | C28.2 86.6,13.4 86,14 IC2.79 | IC2.64 87.35,21.5 | IC2.60 83.1,26.6 C20.2 | C32.1 69.6,13.7 69.9,14 IC2.22 | v63.55,8.75 64.7,7.6 R43.2
  Bottom 0.61: C33.1 C32.1 | C17.1 87.35,21.5 | 87.35,21.5 C34.1 | C28.2 C29.2 88.95,13.05 v87.92,12.03 | C19.2 C20.2 82.6,27.3 v82.6,28.3 | 87.35,21.5 v88.2,21.5
  Bottom 1.016: 68.4,8.3 67.45,7.6 R45.2 R43.2
  Bottom 1.27: 78.1,7.5 v76.8,7.5 | v77.6,29 76.55,29 C31.2 C30.2 | v76.8,7.5 76,8.3 68.4,8.3 72.5,8.6 69.6,8.6 C33.1 | v79.7,6 78.2,7.5 v76.8,7.5
VCC_BATT_IN
  Bottom 0.254: U$2.8 28.95,7.5 28.85,7.5 28.85,7.15 29.1,7.4 29.8,7.4 30.25,7.85 U$2.7
  Bottom 1.016: C25.1 27.5,7.15 | 27.5,7.15 28.85,7.15 | G2.+ 26.03,7.15 27.5,7.15
VCC_BATT_IN2  (via drill 0.6)
  Top 1.016: v75.25,1.45 74.95,1.75 C27.1
  Bottom 0.254: 75,1.75 75.25,1.5
  Bottom 0.305: U$4.8 74.5,2.2 v75.25,1.45 75.3,1.5 75.3,2.25 74.85,2.7 U$4.7
  Bottom 1.016: 75.25,1.5 v75.25,1.45 75.25,1.25 62.12,1.25 58.29,5.08 G1.+
VCCUSB  (via drill 0.6)
  Top 0.254: LED3.2 LED3.4
  Top 0.406: v19.2,68.1 19.2,70.92 C40.+ | v22.1,65.2 23.3,66.4 LED3.4 | LED3.2 25.05,66.65 29.23,62.48 IC3.4 29.23,59.17 R47.1
  Top 0.61: C40.+ 17.43,71.03 U$9.5 | 25.05,66.65 25.5,66.2 R52.1 25.45,58.7 25.45,60.8 21.9,60.8 20.4,59.3 20.4,57.3 22.4,55.3 24.9,55.3 25.29,54.91 JP3.1
  Bottom 0.406: v22.1,65.2 v19.2,68.1
VCCUSBGPS  (via drill 0.6)
  Top 0.254: v34.7,4.6 arc-90 34.6,4.5 R4.1 32.35,3.5 25.4,3.5 25.4,5.7 24.5,6.6 24.5,8.2 25.2,8.9 R7.2
  Bottom 0.254: C24.2 34.2,7.05 34.2,7.4 33.95,7.65 | U$2.1 33.3,8.3 33.95,7.65 | U$2.2 32.75,7.85 33.1,7.5 33.8,7.5 33.95,7.65
  Bottom 1.27: C24.2 34.35,4.95 v34.7,4.6 38.41,4.6 39.1,5.29 JP2.1
VCCUSBGPS2  (via drill 0.6)
  Top 0.254: R40.2 72.9,8.05 C26.2
  Top 0.61: JP1.1 77.44,6.05 v74.9,6.05
  Top 1.016: C26.2 74.6,5.75 v74.9,6.05
  Bottom 0.254: U$4.2 74.9,5.2 v74.9,6.05 | R37.1 79.2,2.5 JP1.1
  Bottom 0.406: U$4.1 74.85,5.7 74.9,5.75 v74.9,6.05

## Text on the board
tText: GND-DP-DM-VCC | SHLD | VCC - TX - RX - GND | GPS: OFF - ON | CFG GPS | ADC-VREF | taGPS v1251-0.3 | GPS: OFF - ON | ADC-VREF | taGPS v1350-0.3 | CFG GPS | VCC | VCC RX TX GND | GND-RST-TST | RESET | TST-RST-GND | VCC RX TX GND | PWRBATT | PWRUSB | VCC | PWRUSB | PWRBATT
_tNames: R3 | R1 | LED1 | JP2 | Q1 | K1 | IC1 | PT2 | D3 | TIMER v4 | PT1 | C5 | C4 | B1 | CX1 | D1 | C3 | R5 | F1 | IC2
_bNames: R2 | C1 | C6 | C7 | R7 | C9 | C8